# Altium PCB PCB_Ticketing_Slave.PcbDoc
Units mm, origin at the board's own origin, x right, y up, seen from the top; angles counter-clockwise.
Board outline 50.04 x 50.04 mm, 2 copper layers (Top Layer, Bottom Layer); 34 components, 22 nets, 127 pads, 74 vias.
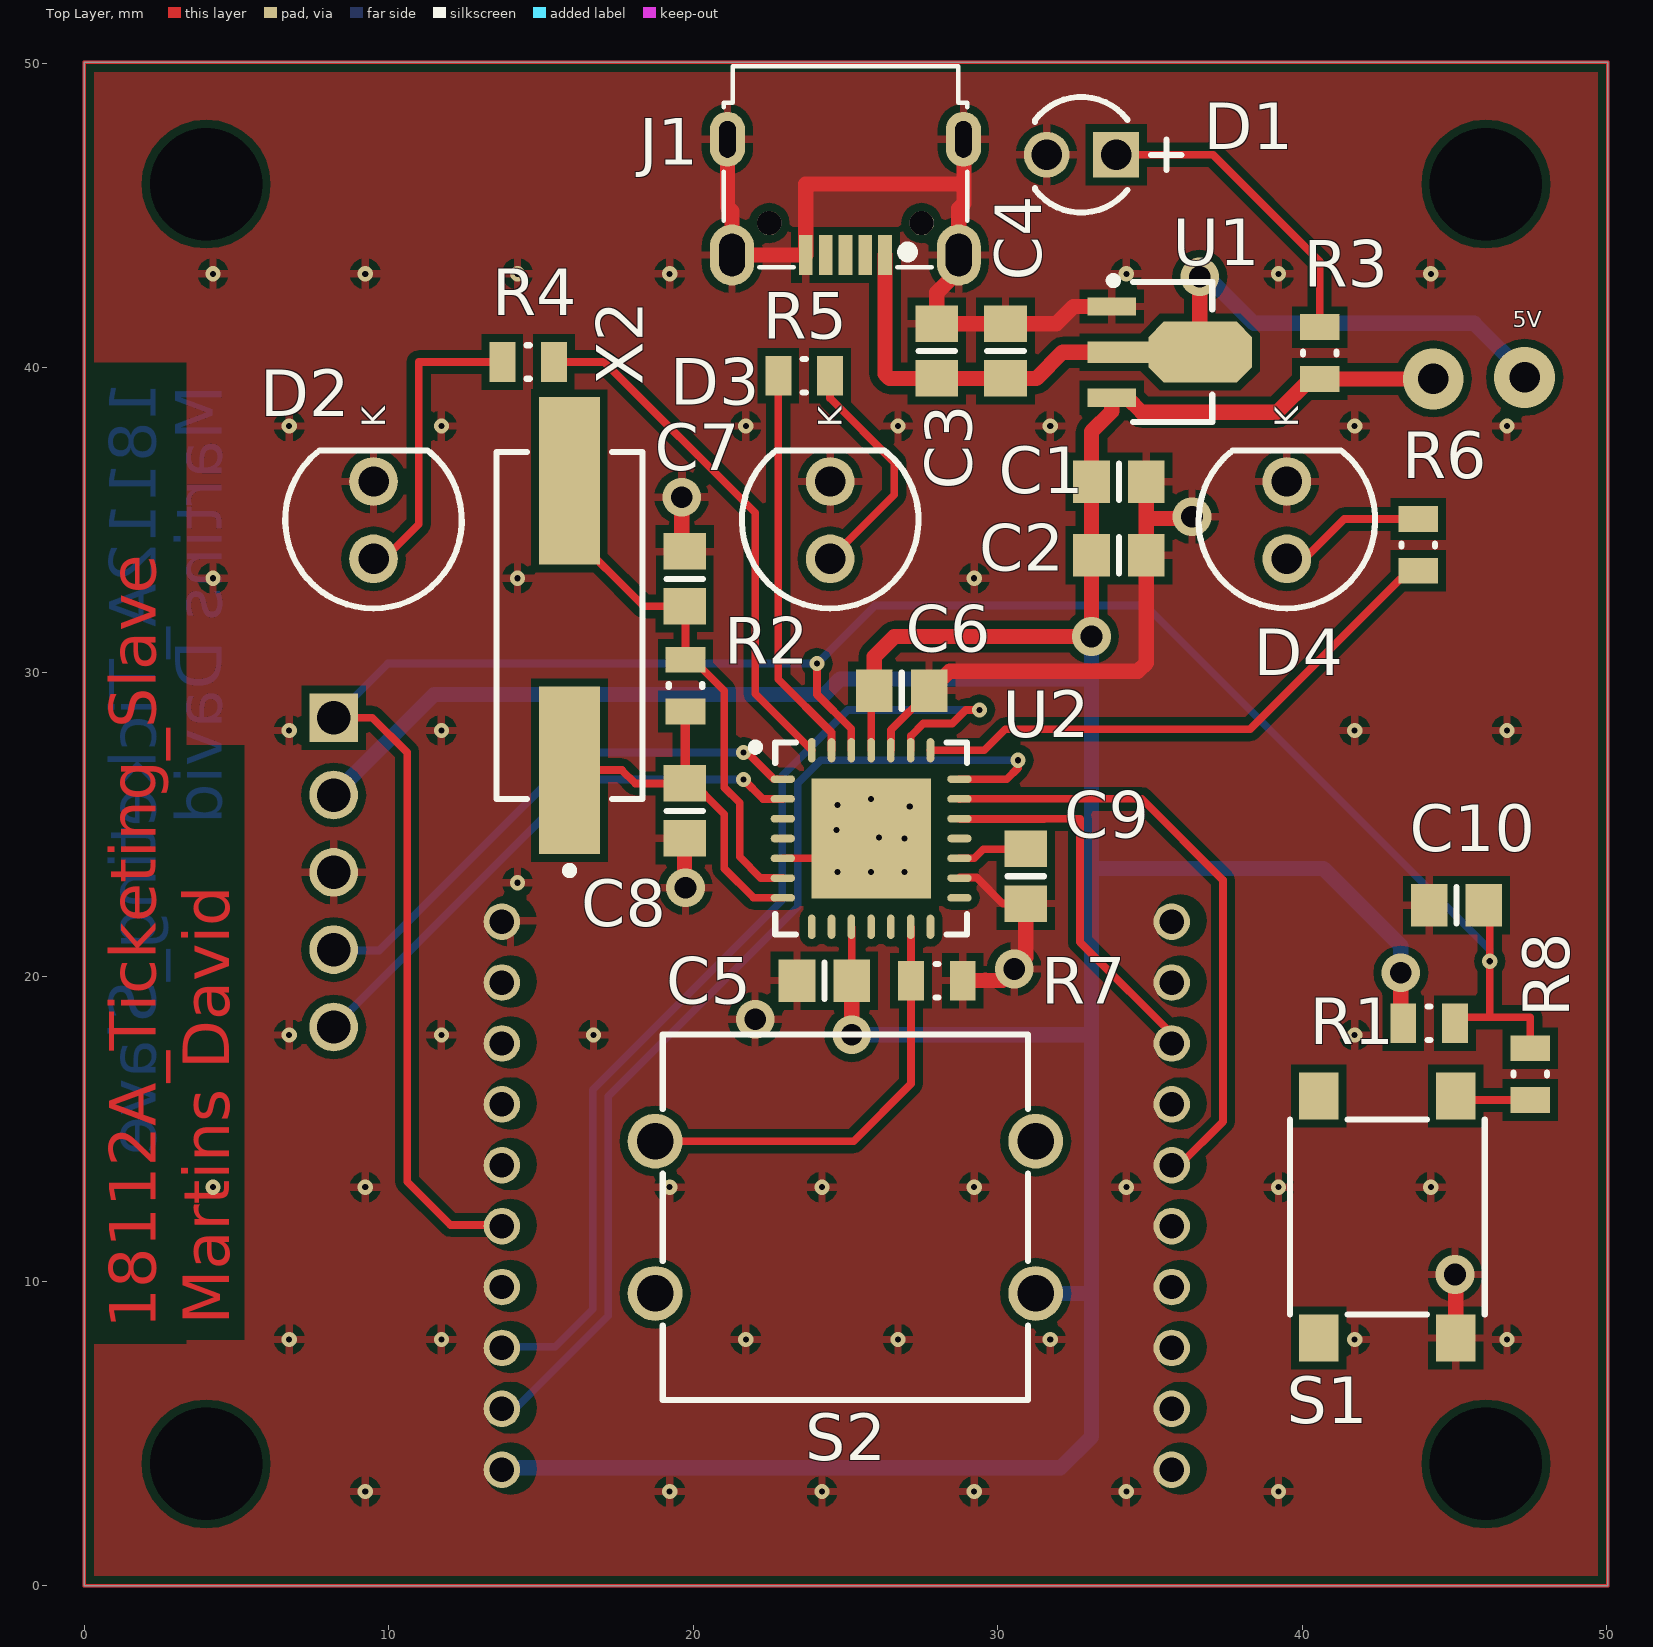
[diagram p0: Top Layer view]
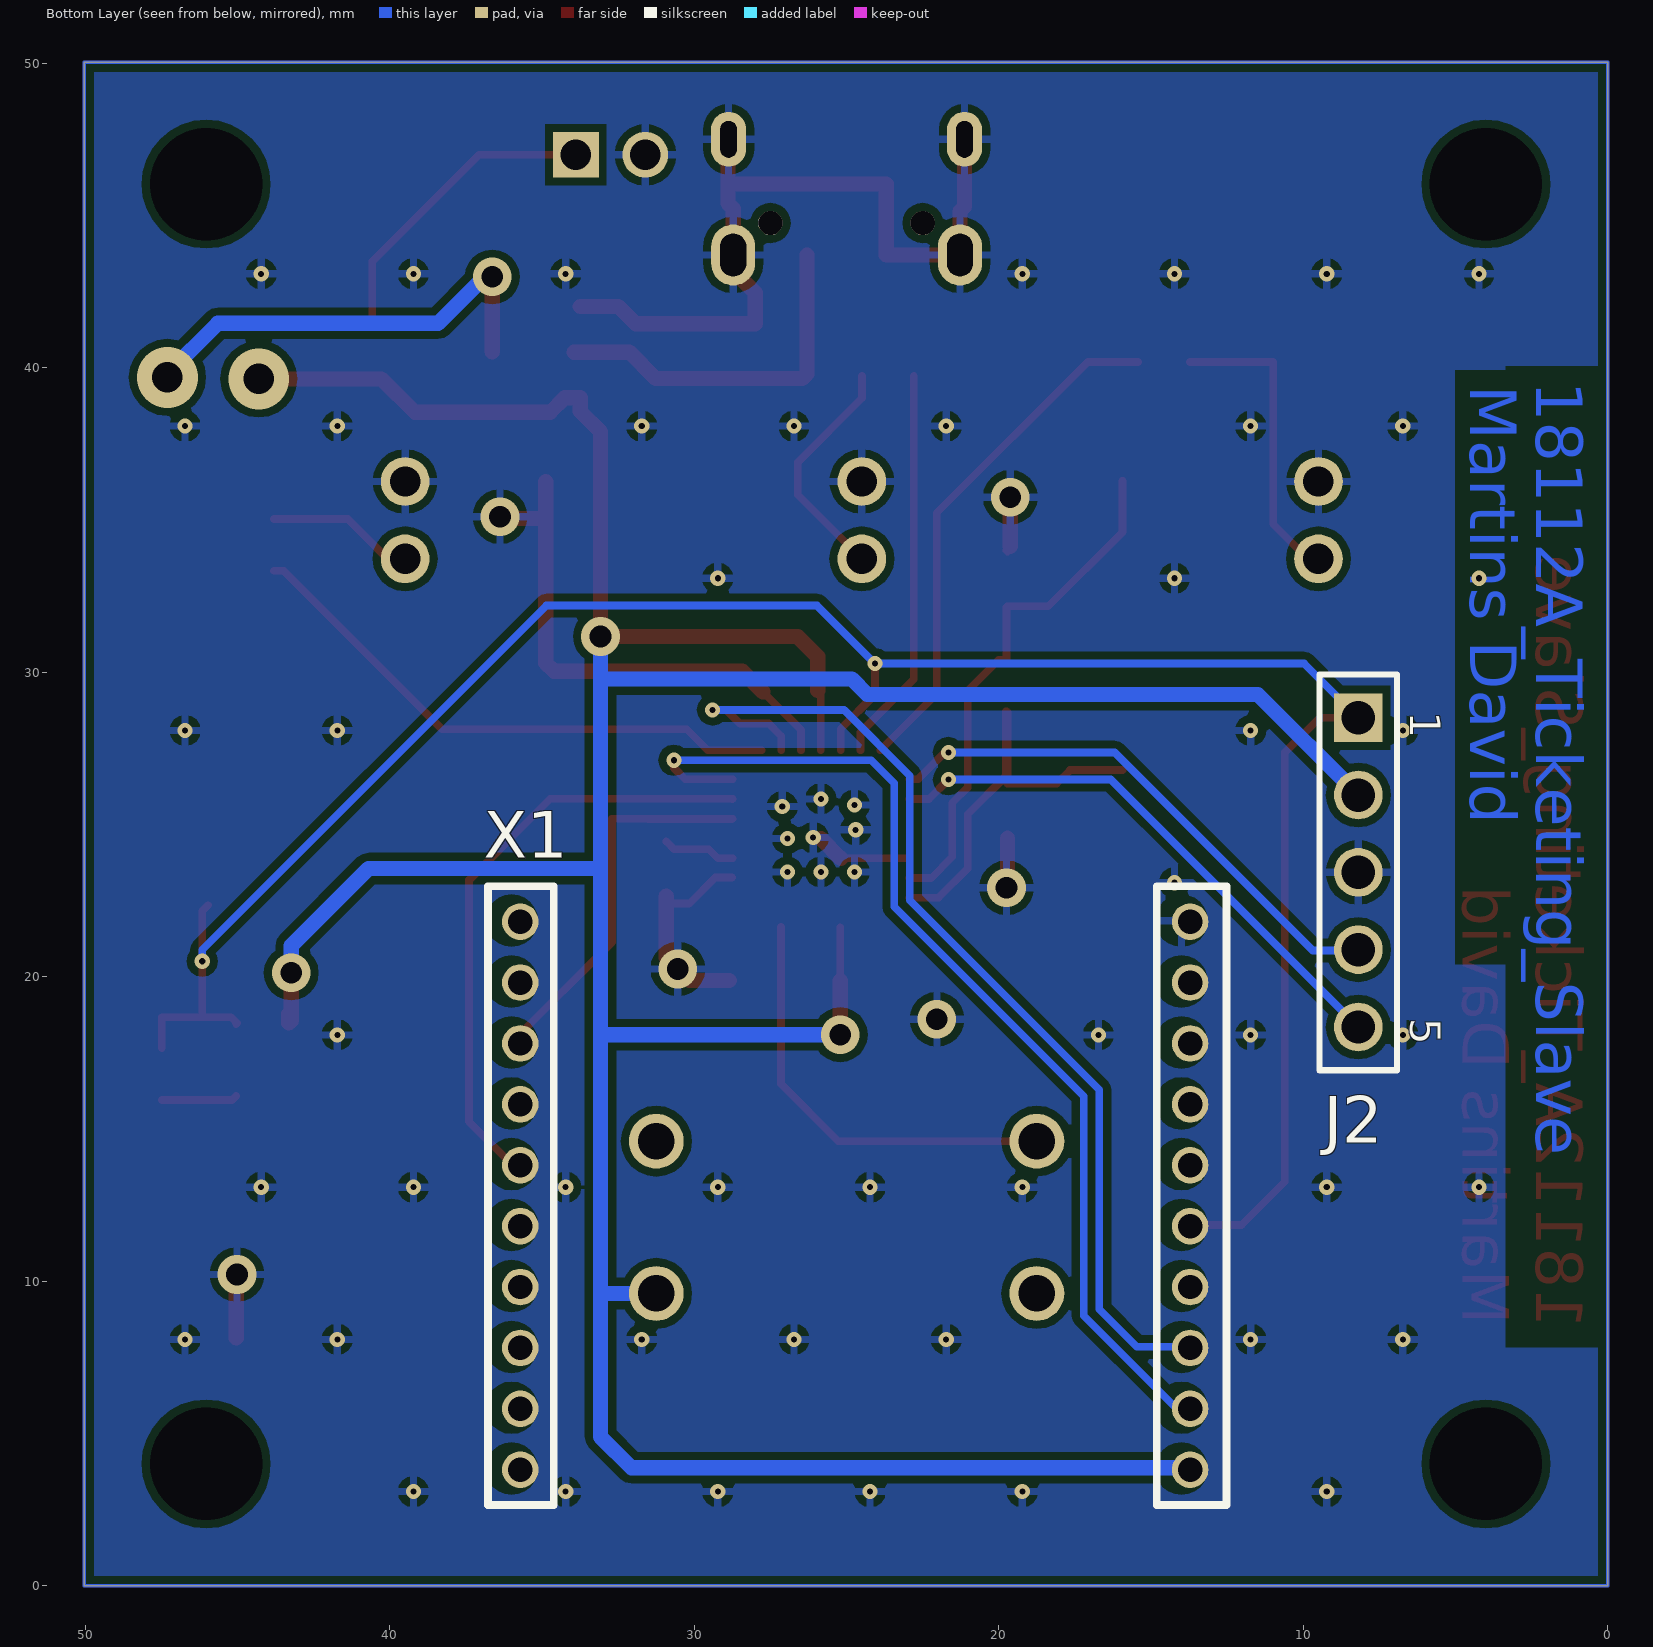
[diagram p1: Bottom Layer view, seen from below]

## Layer stack, top to bottom
Top Solder: solder mask 0.0102, Solder Resist, Dk 3.5
Top Layer: signal copper 0.0356
Dielectric 1: dielectric 0.32, FR-4, Dk 4.8
Bottom Layer: signal copper 0.0356
Bottom Solder: solder mask 0.0102, Solder Resist, Dk 3.5

## Board outline
0,0 50.038,0 50.038,50.038 0,50.038

## Design rules (kind name [scope] priority, off if disabled: settings)
Clearance [All] p1: gap=0.254 ignorepadtopadclearanceinfootprint=FALSE except(0: Arc-Hole Track-Hole SMDPad-Hole THPad-Hole Via-Hole Fill-Hole Poly-Hole Region-Hole Text-Hole)
PolygonConnect PolygonConnect_13 [All] p1: connectstyle=Relief reliefconductorwidth=0.254 reliefentries=4 polygonreliefangle="90 Angle" airgapwidth=0.254
PolygonConnect [HasFootprint('MCHP-QFN-ML28_L')] p2: connectstyle=Direct reliefconductorwidth=0.254 reliefentries=4 polygonreliefangle="90 Angle" airgapwidth=0.254
PolygonConnect PolygonConnect_4 [HasFootprint('4304x60737x6_12x12x7.3')] p3: connectstyle=Relief reliefconductorwidth=0.254 reliefentries=4 polygonreliefangle="90 Angle" airgapwidth=0.254
PolygonConnect PolygonConnect_9 [HasFootprint('RESC0805(2012)_L')] p4: connectstyle=Relief reliefconductorwidth=0.254 reliefentries=4 polygonreliefangle="90 Angle" airgapwidth=0.254
PolygonConnect PolygonConnect_3 [HasFootprint('9774010151')] p5: connectstyle=Relief reliefconductorwidth=0.254 reliefentries=4 polygonreliefangle="45 Angle" airgapwidth=0.254
PolygonConnect PolygonConnect_7 [HasFootprint('61300511121')] p6: connectstyle=Relief reliefconductorwidth=0.254 reliefentries=4 polygonreliefangle="45 Angle" airgapwidth=0.254
PolygonConnect PolygonConnect_5 [HasFootprint('430182050816')] p7: connectstyle=Relief reliefconductorwidth=0.254 reliefentries=4 polygonreliefangle="90 Angle" airgapwidth=0.254
PolygonConnect PolygonConnect_6 [HasFootprint('629105150521')] p8: connectstyle=Relief reliefconductorwidth=0.254 reliefentries=4 polygonreliefangle="45 Angle" airgapwidth=0.254
PolygonConnect PolygonConnect_8 [HasFootprint('ECS-80-18-5PX-TR_V')] p9: connectstyle=Relief reliefconductorwidth=0.254 reliefentries=4 polygonreliefangle="45 Angle" airgapwidth=0.254
PolygonConnect PolygonConnect_2 [HasFootprint('LED-2P-2.28-3MM')] p10: connectstyle=Relief reliefconductorwidth=0.254 reliefentries=4 polygonreliefangle="45 Angle" airgapwidth=0.254
PolygonConnect PolygonConnect_1 [HasFootprint('MCHP-QFN-ML28_L')] p11: connectstyle=Relief reliefconductorwidth=0.254 reliefentries=4 polygonreliefangle="45 Angle" airgapwidth=0.254
PolygonConnect PolygonConnect_10 [HasFootprint('SOT-89-MB3_M')] p12: connectstyle=Relief reliefconductorwidth=0.254 reliefentries=4 polygonreliefangle="90 Angle" airgapwidth=0.254
PolygonConnect PolygonConnect_11 [HasFootprint('Type 5mm')] p13: connectstyle=Relief reliefconductorwidth=0.254 reliefentries=4 polygonreliefangle="45 Angle" airgapwidth=0.254
PolygonConnect PolygonConnect_12 [HasFootprint('ZB-SB')] p14: connectstyle=Relief reliefconductorwidth=0.254 reliefentries=4 polygonreliefangle="45 Angle" airgapwidth=0.254
PolygonConnect "Via to Pour" [All] p15: connectstyle=Direct reliefconductorwidth=0.254 reliefentries=4 polygonreliefangle="90 Angle" airgapwidth=0.254
RoutingVias [All] p1: holewidth=0.711 width=1.27 viastyle="Through Hole" minholewidth=0.711 minwidth=1.27 maxholewidth=0.711 maxwidth=1.27
SolderMaskExpansion [All] p1: expansion=0.102
Width Width_2 [InNetClass('Undefined')] p1: maxlimit=5 minlimit=0.254 preferedwidth=0.5
Width Width_1 [All] p2: maxlimit=0.254 minlimit=0.254 preferedwidth=0.254
30 further rules are at their usual default settings.

## Classes and differential pairs
component class Designator: C5 C6 C7 C8 C9 J2 R1 R2 U2 X2
net class Undefined: 3V3 GND

## Components (designator, comment, footprint, x,y, rotation, side; value= is the part's Value field where it differs from the comment)
C1 "100nF" 6-0805_N 33.983,36.258 r180 top
C2 "10uF" 6-0805_N 33.983,33.845 r180 top
C3 "10uF" 6-0805_N 28.003,40.553 r270 top
C4 "1uF" 6-0805_N 30.257,40.553 r270 top value=10uF
C5 "Cap" 6-0805_N 24.309,19.875 r0 top value=100nF
C6 "Cap" 6-0805_N 26.849,29.4 r180 top value=100nF
C7 "Cap" 6-0805_N 19.717,33.072 r270 top value=12pF
C8 "Cap" 6-0805_N 19.717,25.452 r270 top value=12pF
C9 "Cap" 6-0805_N 30.924,23.304 r90 top value=10uF
C10 "Cap" 6-0805_N 45.074,22.352 r0 top value=120nF
D1 "LED_Rouge" LED-2P-2.28-3MM 32.75,47 r180 top
D2 "LED_Verte" "Type 5mm" 9.5,35 r90 top locked
D3 "LED_Orange" "Type 5mm" 24.5,35 r90 top locked
D4 "LED_Rouge" "Type 5mm" 39.5,35 r90 top locked
J1 "629105150521" 629105150521 25,46.609 r180 top
J2 "2.54 mm_THT_Vertical_5 pin" 61300511121 8.191,23.431 r270 bottom
MP1 "M3" 9774010151 46.038,46.038 r0 top locked
MP2 "M3" 9774010151 46.038,4 r0 top locked
MP3 "M3" 9774010151 4,4 r0 top locked
MP4 "M3" 9774010151 4,46.038 r0 top locked
R1 "47k" RESC0805(2012)_L 44.171,18.478 r0 top
R2 "10M" RESC0805(2012)_L 19.748,29.566 r90 top value=47k
R3 "680" RESC0805(2012)_L 40.576,40.488 r270 top
R4 "680" RESC0805(2012)_L 14.58,40.195 r0 top
R5 "680" RESC0805(2012)_L 23.646,39.737 r180 top
R6 "680" RESC0805(2012)_L 43.818,34.187 r270 top
R7 "10k" RESC0805(2012)_L 28.003,19.875 r0 top
R8 "120" RESC0805(2012)_L 47.498,16.803 r90 top value=10k
S1 "430182050816" 430182050816 42.8,12.11 r90 top
S2 "430466073726" 4304x60737x6_12x12x7.3 25,12.1 r180 top locked
U1 "MCP1700T-3302E/MB" SOT-89-MB3_M 35.75,40.517 r0 top
U2 "PIC32MX130F064B-I/ML" MCHP-QFN-ML28_L 25.844,24.542 r0 top
X1 "Header ZB-SB" ZB-SB 24.716,12.81 r0 bottom value=2x10
X2 "LF XTAL003151" ECS-80-18-5PX-TR_V 15.938,31.541 r90 top

## Footprints (in the part's own frame and the unit in brackets; to place one, negate y for a bottom-side part, rotate by r counter-clockwise, add the part's x,y. Pads: shape width x height; smd on the part's side, far side on the other; paste and mask are expansions set on the pad)
6-0805_N [mm] "Chip Resistor, Body 2.0x1.2mm, IPC Medium Density"
  rect 1.2x1.4 smd: 1(-0.9,0) 2(0.9,0)
  silkscreen extent 0,-0.6 0,0.6, body extent -1.07,-0.7 1.07,0.7, height 0.7
4304x60737x6_12x12x7.3 [mm] "12x12mm washable Tact Switch, THT version"
  round 1.8 hole 1.2: 1(-6.25,2.5) 2(6.25,2.5) 3(-6.25,-2.5) 4(6.25,-2.5)
  silkscreen extent -6,-6 6,6, body extent -6.99,-6 6.99,6, height 7.35
9774010151 [mm] "M2.5 Thread Internal, Length 1mm"
  round 0 hole 3.7 unplated paste-403.566: 1(0,0)
61300511121 [mm] "Pin Header, pitch 2.54 mm, THT, Vertical, single row, 5p"
  rect 1.6x1.6 hole 1.1: 1(-5.08,0)
  round 1.6 hole 1.1: 2(-2.54,0) 3(0,0) 4(2.54,0) 5(5.08,0)
  silkscreen extent -6.5,-1.27 6.5,1.27, body extent -6.35,-1.27 6.35,1.27, height 8.57
430182050816 [mm] "SMD Tact Switch, body 6x6mm"
  rect 1.55x1.3 smd: 1(-3.975,2.25) 2(-3.975,-2.25) 3(3.975,2.25) 4(3.975,-2.25)
  silkscreen extent -3.2,-3.2 3.2,3.2, body extent -4.5,-3.1 4.5,3.1, height 5.03
629105150521 [mm] "Micro USB 2.0 SMT Type B Horizontal 5 Contacts High Current"
  rect 0.45x1.3 smd: 1(-1.3,2.9) 2(-0.65,2.9) 3(0,2.9) 4(0.65,2.9) 5(1.3,2.9)
  oval 1.15x1.8 hole 0.55 slot 1.2 at 90 deg: Shell(-3.875,-0.9) Shell(3.875,-0.9)
  oval 1.45x2 hole 0.85 slot 1.4 at 90 deg: Shell(-3.725,2.9) Shell(3.725,2.9)
  round 0.8 hole 0.8 unplated: ""(-2.5,1.85) ""(2.5,1.85)
  silkscreen extent -4,-3.3 4,3.3, body extent -4,-3.3 4,3.3, height 2.71
ECS-80-18-5PX-TR_V [mm] "SMD, 2-Leads, Body 11.4x4.8mm, Height 4.3mm"
  rect 5.5x2 smd: 1(-4.75,0) 2(4.75,0)
  silkscreen extent -8.17,-2.4 5.7,2.4, body extent -6.6,-2.4 6.6,2.4, height 4.3
LED-2P-2.28-3MM [mm] "LED, 2-Leads, Dia 3mm, Pitch 2.28mm"
  rect 1.5x1.5 hole 1: 1(-1.14,0)
  round 1.5 hole 1: 2(1.14,0)
  silkscreen extent -3.29,-1.9 1.52,1.9, body extent -1.9,-1.91 1.52,1.91, height 5.3
MCHP-QFN-ML28_L [mm] "QFN, 28-Leads, Body 6x6mm, Pitch 0.65mm, Thermal Pad 3.7x3.7mm, IPC High Density"
  oval 0.8x0.25 smd: 1(-2.9,1.95) 2(-2.9,1.3) 3(-2.9,0.65) 4(-2.9,0) 5(-2.9,-0.65) 6(-2.9,-1.3) 7(-2.9,-1.95) 15(2.9,-1.95) 16(2.9,-1.3) 17(2.9,-0.65) 18(2.9,0) 19(2.9,0.65) 20(2.9,1.3) 21(2.9,1.95)
  oval 0.25x0.8 smd: 8(-1.95,-2.9) 9(-1.3,-2.9) 10(-0.65,-2.9) 11(0,-2.9) 12(0.65,-2.9) 13(1.3,-2.9) 14(1.95,-2.9) 22(1.95,2.9) 23(1.3,2.9) 24(0.65,2.9) 25(0,2.9) 26(-0.65,2.9) 27(-1.3,2.9) 28(-1.95,2.9)
  rect 3.93x3.93 smd: 29(0,0)
  silkscreen extent -3.92,-3.15 3.15,3.15, body extent -3,-3 3,3, height 1
RESC0805(2012)_L [mm] "Chip Resistor, Body 2.0x1.3mm, IPC High Density"
  rect 0.85x1.3 smd: 1(-0.85,0) 2(0.85,0)
  silkscreen extent -0.05,-0.55 0.05,0.55, body extent -1.1,-0.67 1.1,0.68, height 0.7
SOT-89-MB3_M [mm] "SOT89, 3-Leads, Body 4.5x2.4 mm, Pitch 1.5mm, Lead Span 4.1mm, IPC Low Density"
  rect 1.6x0.6 smd: 1(-2,1.5) 3(-2,-1.5)
  rect 2x0.7 smd: 2(-1.8,0)
  oct 3.4x2 smd: 2(0.9,0)
  silkscreen extent -2.07,-2.3 1.3,2.47, body extent -1.3,-2.3 1.3,2.3, height 1.6
"Type 5mm" [mm] "THT, LED-5mm, 2pin- Body 5.8mm"
  round 1.6 hole 1: 1(1.27,0) 2(-1.27,0)
  silkscreen extent -2.9,-2.9 2.29,2.9, body extent -2.9,-2.9 2.5,2.9, height 11.7
ZB-SB [mm] "Header"
  round 1.2 hole 0.8: 1(-11,9) 2(-11,7) 3(-11,5) 4(-11,3) 5(-11,1) 6(-11,-1) 7(-11,-3) 8(-11,-5) 9(-11,-7) 10(-11,-9) 11(11,9) 12(11,7) 13(11,5) 14(11,3) 15(11,1) 16(11,-1) 17(11,-3) 18(11,-5) 19(11,-7) 20(11,-9)
  silkscreen extent -12.19,-10.16 12.06,10.16, body extent -12.55,-10.34 12.45,30.66, height 7.5

## Part data
C1: library part CMP-1036-04401-1, "CAP 100nF 16V ±10% 0805 (2012 Metric) Thickness 1.45mm SMD", Case-EIA=0805, Case-Metric=2012, Rated Voltage="16 V", Tolerance=±10%, Max Thickness="1.45 mm", Technology=SMT
C2 C3 C4: library part CMP-1036-04930-1, "CAP 10uF 16V ±20% 0805 (2012 Metric) Thickness 1mm SMD", Case-EIA=0805, Case-Metric=2012, Rated Voltage="16 V", Tolerance=±20%, Max Thickness="1 mm", Technology=SMT
C5 C6 C7 C8 C9 C10: "Capacitor", LatestRevisionDate=17-Jul-2002, LatestRevisionNote="Re-released for DXP Platform.", PackageDescription="Radial Cap, Thru-Hole; 2 Leads; 0.3 in Pin Spacing", PackageReference=RAD-0.3, Published=8-Jun-2000, Publisher="Altium Limited"
D1 D2 D3 D4: library part LED, "LED"
  D1: Supplier A Ref=754-1305-ND
  D2: Supplier A Ref=754-1265-ND
  D3: Supplier A Ref=754-1896-ND
  D4: Supplier A Ref=754-1266-ND
J1: "Micro USB 2.0 SMT Type B Horizontal 5 Contacts High Current WR-COM", ComponentLink1Description=Manufacturer, ComponentLink1URL=http://www.we-online.de, ComponentLink2Description=Datasheet, ComponentLink2URL=http://katalog.we-online.de/em/datasheet/629105150521.pdf, Construction=SMT, Gender=Receptacle, Interface Type="Type B", Part Number=629105150521, Published Date="April 2017", Publisher="Wurth Elektronik", Sub-Family="Micro USB 2.0", Type=Horizontal
J2: library part 61300511121, "Pin Header WR-PHD, pitch 2.54 mm, THT, Vertical, single row, 5 pin", Contact Resistance="20 mOhm", Insulation Resistance=">1000 MOhm", Operating Temperature="-40 to 105 degC", Rated Current="3 A", Working Voltage="250 VAC", ComponentLink1Description=Manufacturer, ComponentLink1URL=http://www.we-online.de, ComponentLink2Description=Datasheet, ComponentLink2URL=http://katalog.we-online.de/em/datasheet/6130xx11121.pdf, Mounting Technology=THT, Orientation=Vertical, Part Number=61300511121, Pin Number=5, Pitch="2.54 mm", Published Date="Jan. 2018", Publisher="Wurth Elektronik", Row Number=Single
MP1 MP2 MP3 MP4: library part 9774010151, "WA-SMSI SMT Steel Spacer, M2.5 Thread Internal, Length 1mm", ComponentLink1Description=Manufacturer, ComponentLink1URL=http://www.we-online.de, ComponentLink2Description=Datasheet, ComponentLink2URL=http://katalog.we-online.de/em/datasheet/9774010151.pdf, InnerDiameter=3.5mm, Length=1mm, OuterDiameter=5.1mm, Packaging=Bulk, PartNumber=9774010151, PublishedDate="Dec. 2016", Publisher="Wurth Elektronik", Thread=M2.5
R1 R2 R3 R4 R5 R6 R7 R8: library part CMP-1013-00122-1, "100K 0.125W 5% 0805 (2012 Metric)  SMD", Case-EIA=0805, Case-Metric=2012, Power="0.125 W", Tolerance="5 %", Technology=SMT
S1: "6x6mm SMD Tact Switch WS-TASV, height 5 mm, 160 gf", Operating Temperature="-40 to +85 degC", Rated Current="50 mA", Rated Voltage="12 VDC", ComponentLink1Description=Manufacturer, ComponentLink1URL=http://www.we-online.de, ComponentLink2Description=Datasheet, ComponentLink2URL=http://katalog.we-online.de/em/datasheet/4301x2xxx8x6.pdf, Life Cycle=1000000, Operation Force="160 gf", Part Number=430182050816, Published Date="Nov. 2017", Publisher="Wurth Elektronik", Size="6x6x5 mm"
S2: "WS-TATV 12x12mm washable Tact Switch, THT version", ComponentLink1Description=Manufacturer, ComponentLink1URL=http://www.we-online.de, ComponentLink2Description=Datasheet, ComponentLink2URL=http://katalog.we-online.de/em/datasheet/4304x60737x6.pdf, Life Cycle="300000 cycles", Operation Force=260g, Part Number=430466073726, Published Date="June 2017", Publisher="Wurth Elektronik", Size="12x12x7.3 mm"
U1: library part CMP-0136-00812-1, "Low Quiescent Current LDO, 3-Pin SOT-89, Extended Temperature, Tape and Reel", Code_IPC=SOT89, DatasheetVersion="revB, Feb-2007", PackageDescription="3-Lead Plastic Small Outline Transistor Header (MB) [SOT-89]", PackageReference=SOT-89-MB3, PackageVersion="revBB, Aug-2009"
U2: library part CMP-0048-00437-1, "32-bit Microcontroller with Audio and Graphics Interface, USB and Advanced Analog, 40 MHz, 21 I/O, PMP, -40 to 85 degC, 28-pin QFN (ML28), Tube", Manufacturer=Microchip, ComponentLink1Description="Manufacturer URL", ComponentLink1URL=http://www.microchip.com, ComponentLink2Description=Datasheet, ComponentLink2URL=http://ww1.microchip.com/downloads/en/DeviceDoc/61168E.pdf, ComponentLink3Description="Package Specification", ComponentLink3URL=http://www.microchip.com/stellent/groups/techpub_sg/documents/packagingspec/en012702.pdf, ComponentLink4Description="Product URL", ComponentLink4URL=http://www.microchip.com/PIC32MX130F064B, DatasheetVersion="Rev. E", Mounting Technology="Surface Mount", PackageDescription="28-Lead Plastic Quad Flat, 6 x 6 mm Body, 0.65 mm Pitch", PackageReference=QFN-ML28, PackageVersion=C04-105C, PartNumber=PIC32MX130F064B-I/ML
X1: library part "HDR ZB-SB 2x10", "Header 2x10", PackageCase=XBee
X2: library part CMP-2000-06193-1, "Low Profile Quartz Crystal, 8.0 MHz, 2-Pin SMD, RoHS, Tape and Reel", Case Height=4.3mm, Case Length=13.2mm, Case Width=4.8mm, Frequency=8MHz, Frequency Stability=50PPM, Load Capacitance=18pF, Manufacturer=ECS, Operating Temperature Range=-10Cto+70C, Package / Case=HC-49/US, Package Description="2-Pin Surface Mount Device, Body 11.4 x 4.8 mm, Height 4.3 mm", Package Reference=ECS-80-18-5PX-TR, Tolerance=30PPM, Brand=ECS, Datasheet URL=https://www.ecsxtal.com/store/pdf/csm-7x.pdf, Datasheet Version=05/2016, Dimensions=4.8mmWx13.2mmLx4.3mmH, Factory Pack Quantity=1000, Manufacturer URL=https://www.ecsxtal.com/, Mounting Style=SMD/SMT, Mounting Technology=SurfaceMount, Packaging=Reel, Product Category=Crystals, RoHS=Details, Series=CSM-7X, Termination Style=SMD/SMT, Type=SMDQuartzCrystals

## Via types
v1: diameter 0.5, hole 0.2, Top Layer to Bottom Layer, 62 vias
v2: diameter 1.27, hole 0.711, Top Layer to Bottom Layer, 10 vias
v3: diameter 2, hole 1, Top Layer to Bottom Layer, 2 vias

## Nets (pads, with @x,y where several pads share a name; then routed paths per layer and width w, separated by ;. In a path a pad name is that pad's centre, name@x,y a point inside that pad or via, vN(x,y) a via of type N, cw(c..) or ccw(c..) an arc to the next point about the centre after c; other vN are vias at no path point)
3V3: C1.2 C2.2 C5.2 C6.2 J2.2 R1.1 R3.2 S2.1 U1.3 U2.10 U2.25 X1.1 | length 129.5
  Top Layer w0.254: C5.2 U2.10@25.209,21.627 ; U2.25 25.844,29.295 C6.2
  Top Layer w0.5: v2(25.209,18.097) C5.2 ; C6.2 25.949,30.521 26.606,31.178 v2(33.083,31.178) C2.2 C1.2 33.083,37.909 33.75,38.576 U1.3 34.261,39.017 34.734,38.544 39.179,38.544 40.273,39.638 R3.2 v3(44.308,39.638) ; v2(43.243,20.129) 43.243,18.556 R1.1 R1.1@43.321,18.781
  Bottom Layer w0.5: J2.2 11.493,29.273 24.32,29.273 24.828,29.781 33.083,29.781 ; X1.1@14,3.844 14.029,3.873 32.067,3.873 33.083,4.889 33.083,9.6 ; v2(25.209,18.097) 33.083,18.097 ; S2.1 33.083,9.6 ; v2(33.083,31.178) 33.083,29.781 ; v2(43.243,20.129) 43.243,21.018 40.703,23.558 33.083,23.558 ; 33.083,9.6 33.083,18.097 ; 33.083,18.097 33.083,23.558 ; 33.083,23.558 33.083,29.781
5V_USB: C3.2 C4.2 J1.1 U1.2 | length 26.6
  Top Layer w0.254: U1.2@36.639,40.528 U1.2@36.65,40.517
  Top Layer w0.5: J1.1 26.3,39.798 26.445,39.653 C3.2 C4.2 31.271,39.653 32.135,40.517 U1.2@33.95,40.517 ; U1.2@36.639,40.528 v2(36.639,42.989)
  Bottom Layer w0.254: v2(36.639,42.989) v2@36.893,42.989
  Bottom Layer w0.5: v2@36.893,42.989 38.417,41.465 45.656,41.465 47.307,39.814 v3(47.307,39.687)
Connect(M): U2.19 X1.18 | length 12.7
  Top Layer w0.254: U2.19 28.751,25.185 31.531,25.185 31.539,25.192 32.702,25.192 32.702,21.142 X1.18@36,17.844
GND: C1.1 C2.1 C3.1 C4.1 C5.1 C6.1 C7.1 C8.2 C9.1 C10.1 D1.2 D2.1 D3.1 D4.1 J1.5 J1.Shell J2.3 R7.2 S1.2 U1.1 U2.5 U2.16 U2.24 U2.29 X1.10 | length 59.5
  Top Layer w0.254: C7.1@19.621,34.13 19.748,34.003 C7.1 ; v2@19.717,22.954 v2(19.748,22.923) ; U2.5 U2.29@25.194,23.892 ; U2.24 26.494,28.106 C6.1@27.749,29.361 ; U2.16@28.763,23.261 29.316,23.261 30.173,22.404 C9.1
  Top Layer w0.5: C7.1@19.621,34.13 v2(19.621,35.75) ; v2@19.717,22.954 C8.2 ; J1.Shell@21.125,47.509 21.125,45.295 21.275,45.145 21.275,43.709 J1.5 23.7,46.022 23.685,46.037 28.892,46.037 ; v2(22.034,18.605) v2@22.139,18.605 ; U2.29@25.194,23.892 U2.29 ; C6.1@27.749,29.361 28.427,30.039 34.611,30.039 34.883,30.311 C2.1 34.883,35.051 ; R7.2 30.162,19.875 v2(30.543,20.256) 30.924,20.637 C9.1@30.924,22.647 ; J1.Shell@28.875,47.509 28.892,47.492 28.892,46.037 ; U1.1 32.492,42.017 31.928,41.453 C4.1 C3.1 28.003,42.481 28.725,43.203 28.725,43.709 28.725,45.235 28.892,45.402 28.892,46.037 ; C1.1 34.883,35.051 ; v2(36.385,35.115) 36.321,35.051 34.883,35.051 ; v2(45.021,10.223) 45.05,10.194 S1.2
  other v1: 9.228,3.09 19.228,3.09 24.228,3.09 29.228,3.09 34.228,3.09 39.228,3.09 6.728,8.09 11.728,8.09 21.728,8.09 26.728,8.09 31.728,8.09 41.728,8.09 46.728,8.09 4.228,13.09 9.228,13.09 19.228,13.09 24.228,13.09 29.228,13.09 34.228,13.09 39.228,13.09 44.228,13.09 6.728,18.09 11.728,18.09 16.728,18.09 41.728,18.09 14.228,23.09 24.744,23.442 25.844,23.442 26.944,23.442 26.944,24.542 26.098,24.574 24.701,24.828 27.114,25.59 24.744,25.642 25.844,25.844 6.728,28.09 11.728,28.09 41.728,28.09 46.728,28.09 4.228,33.09 14.228,33.09 29.228,33.09 6.728,38.09 11.728,38.09 21.728,38.09 26.728,38.09 31.728,38.09 41.728,38.09 46.728,38.09 4.228,43.09 9.228,43.09 14.228,43.09 19.228,43.09 34.228,43.09 39.228,43.09 44.228,43.09
LED_Lost: R6.2 U2.22 | length 18.5
  Top Layer w0.254: U2.22 29.562,27.442 30.249,28.13 38.29,28.13 43.497,33.337 R6.2
LED_Ques: R4.2 U2.28 | length 17.2
  Top Layer w0.254: R4.2 17.081,40.195 22.034,35.242 22.034,29.302 U2.28
LED_Send: R5.2 U2.27 | length 13
  Top Layer w0.254: R5.2 22.796,29.773 24.544,28.025 U2.27
LINK(M): U2.20 X1.16 | length 19.7
  Top Layer w0.254: U2.20 28.746,25.844 34.734,25.844 37.401,23.177 37.401,15.245 X1.16@36,13.844
NetC7_2: C7.2 R2.2 U2.6 X2.2 | length 17.3
  Top Layer w0.254: X2.2 15.938,34.607 18.373,32.172 C7.2 19.748,32.141 R2.2 20.002,30.416 21.022,29.396 21.022,26.218 21.526,25.714 21.526,23.939 22.223,23.242 U2.6
NetC8_1: C8.1 R2.1 U2.7 X2.1 | length 14.4
  Top Layer w0.254: X2.1 17.658,26.791 18.097,26.352 C8.1 19.717,28.685 R2.1 19.763,28.716 19.763,26.595 21.018,25.34 21.018,23.558 21.984,22.592 U2.7
NetC9_2: C9.2 U2.17 | length 2.4
  Top Layer w0.254: U2.17 29.226,23.892 29.527,24.193 30.67,24.193 C9.2@30.924,24.447
NetD1_1: D1.1 R3.1 | length 10.3
  Top Layer w0.254: D1.1 37.073,47 40.576,43.497 R3.1
NetD2_2: D2.2 R4.1 | length 10
  Top Layer w0.254: D2.2 9.854,33.73 10.985,34.861 10.985,40.195 R4.1
NetD3_2: D3.2 R5.1 | length 7.8
  Top Layer w0.254: D3.2 26.606,35.836 26.606,36.893 24.496,39.003 R5.1 R5.1@24.5,39.733
NetD4_2: D4.2 R6.1 | length 4.9
  Top Layer w0.254: D4.2 40.08,33.73 41.387,35.037 R6.1
NetR7_1: R7.1 S2.4 U2.13 | length 14.3
  Top Layer w0.254: S2.4 25.268,14.6 27.153,16.485 R7.1 27.153,21.633 U2.13
NetR8_1: R8.1 S1.4 | length 2.5
  Top Layer w0.254: S1.4 45.182,15.953 R8.1
PGEC1: J2.5 U2.2 | length 18.4
  Top Layer w0.254: v1(21.653,26.479) 22.29,25.842 U2.2
  Bottom Layer w0.254: J2.5 16.319,26.479 v1(21.653,26.479)
PGED1: J2.4 U2.1 | length 17.8
  Top Layer w0.254: v1(21.653,27.368) 21.78,27.368 22.656,26.492 U2.1
  Bottom Layer w0.254: J2.4 8.191,20.863 9.687,20.863 16.192,27.368 v1(21.653,27.368)
RESET: C10.2 J2.1 R1.2 R8.2 U2.26 X1.5 | length 76.2
  Top Layer w0.254: J2.1 9.461,28.511 10.604,27.368 10.604,13.271 12.031,11.844 X1.5@14,11.844 ; v1(24.066,30.289) 24.066,29.273 25.194,28.145 U2.26 ; R1.2@45.05,18.449 R1.2 45.212,18.669 46.101,18.669 ; C10.2 46.164,22.162 v1(46.164,20.51) 46.164,18.732 46.101,18.669 ; R8.2 47.498,18.669 46.101,18.669
  Bottom Layer w0.254: J2.1 9.969,30.289 v1(24.066,30.289) 25.971,32.194 34.861,32.194 46.164,20.891 v1(46.164,20.51)
UART_RX: U2.21 X1.2 | length 34.4
  Top Layer w0.254: U2.21 30.302,26.492 30.67,26.86 v1(30.67,27.114)
  Bottom Layer w0.254: X1.2@14,5.844 14.182,5.844 17.208,8.87 17.208,16.08 23.431,22.303 23.431,26.352 24.193,27.114 v1(30.67,27.114)
UART_TX: U2.23 X1.3 | length 33.8
  Top Layer w0.254: U2.23 27.144,27.906 27.557,28.319 28.507,28.319 28.953,28.765 v1(29.4,28.765)
  Bottom Layer w0.254: X1.3@14,7.844 15.464,7.844 16.7,9.08 16.7,16.291 22.923,22.514 22.923,26.606 25.082,28.765 v1(29.4,28.765)
pads on no net: J1. J1.2 J1.3 J1.4 MP1.1 MP2.1 MP3.1 MP4.1 S1.1 S1.3 S2.2 S2.3 U2.3 U2.4 U2.8 U2.9 U2.11 U2.12 U2.14 U2.15 U2.18 X1.4 X1.6 X1.7 X1.8 X1.9 X1.11 X1.12 X1.13 X1.14 X1.15 X1.17 X1.19 X1.20

## Polygon pours and split planes (outlines as drawn)
GND on Bottom Layer "Top Layer-No Net" (solid, remove dead copper, pour order 0): 0.19,0.19 0.19,49.72 49.72,49.72 49.72,0.19
GND on Top Layer "Top Layer-No Net" (solid, remove dead copper, pour order 2): 0.19,49.72 49.72,49.72 49.72,0.19 0.19,0.19

## Other copper
Top Layer:
  text "Martins David" at 4.762,8.572 h1.52 r90
  text "18112A_Ticketing_Slave" at 2.349,8.445 h1.52 r90
Bottom Layer:
  text "18112A_Ticketing_Slave" at 2.349,39.56 h1.52 r90
  text "Martins David" at 4.508,39.433 h1.52 r90
Multi-Layer:
  the board outline again, w0.125

## Silkscreen, mask and mechanical layers (free items; w line width, h text height)
Top Overlay:
  text "5V" at 46.926,41.338 h0.52

## Text inside footprints (layer, text, board x,y; h text height)
D2: Top Overlay "K" at 9.881,38.048 h0.76 r90; Mechanical 15 "K" at 9.881,38.048 h0.76 r90
D3: Top Overlay "K" at 24.881,38.048 h0.76 r90; Mechanical 15 "K" at 24.881,38.048 h0.76 r90
D4: Top Overlay "K" at 39.881,38.048 h0.76 r90; Mechanical 15 "K" at 39.881,38.048 h0.76 r90
J1: Mechanical 15 "PCB Edge" at 26.9,49.009 h1 r180
J2: Bottom Overlay "5" at 6.491,18.631 h1 r90; Bottom Overlay "1" at 6.491,28.701 h1 r90